# Altium PCB usb_ir.PCBDOC
Units mil, origin at the board's own origin, x right, y up, seen from the top; angles counter-clockwise.
Board outline 1399.8 x 1260 mil, 2 copper layers (Top Layer, Bottom Layer); 15 components, 17 nets, 58 pads, 0 vias.
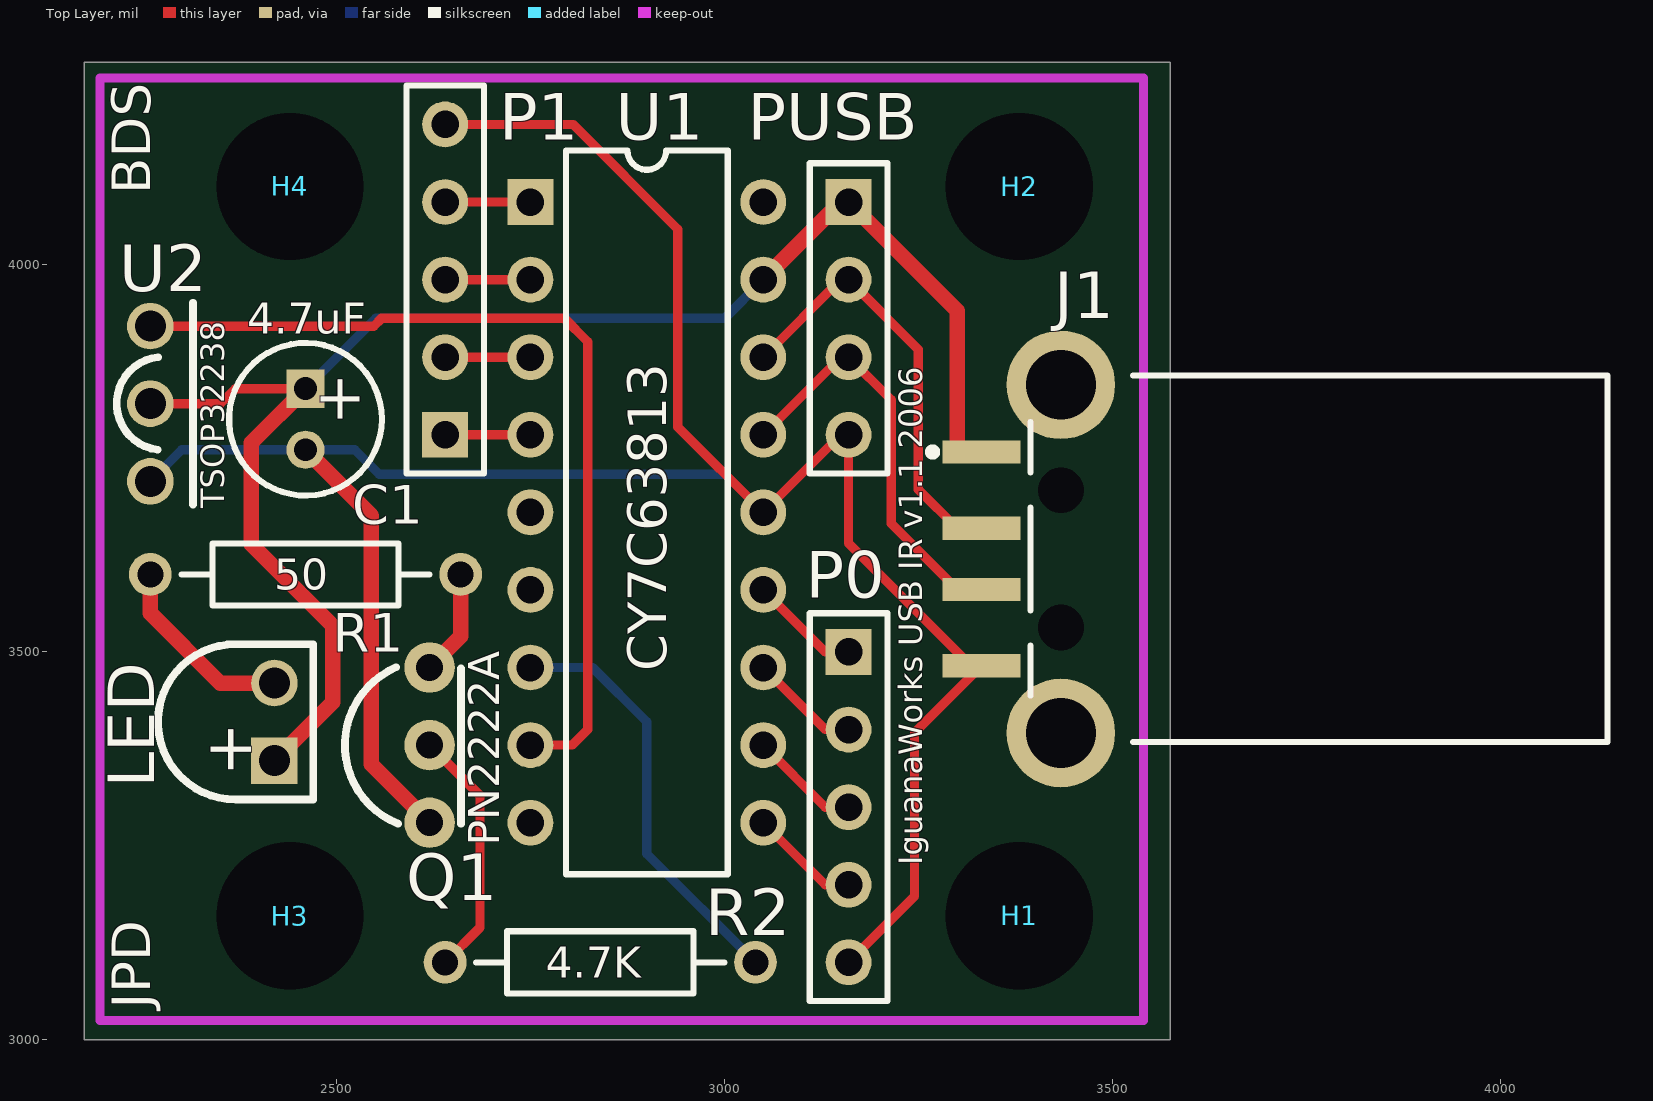
[diagram p0: Top Layer view]
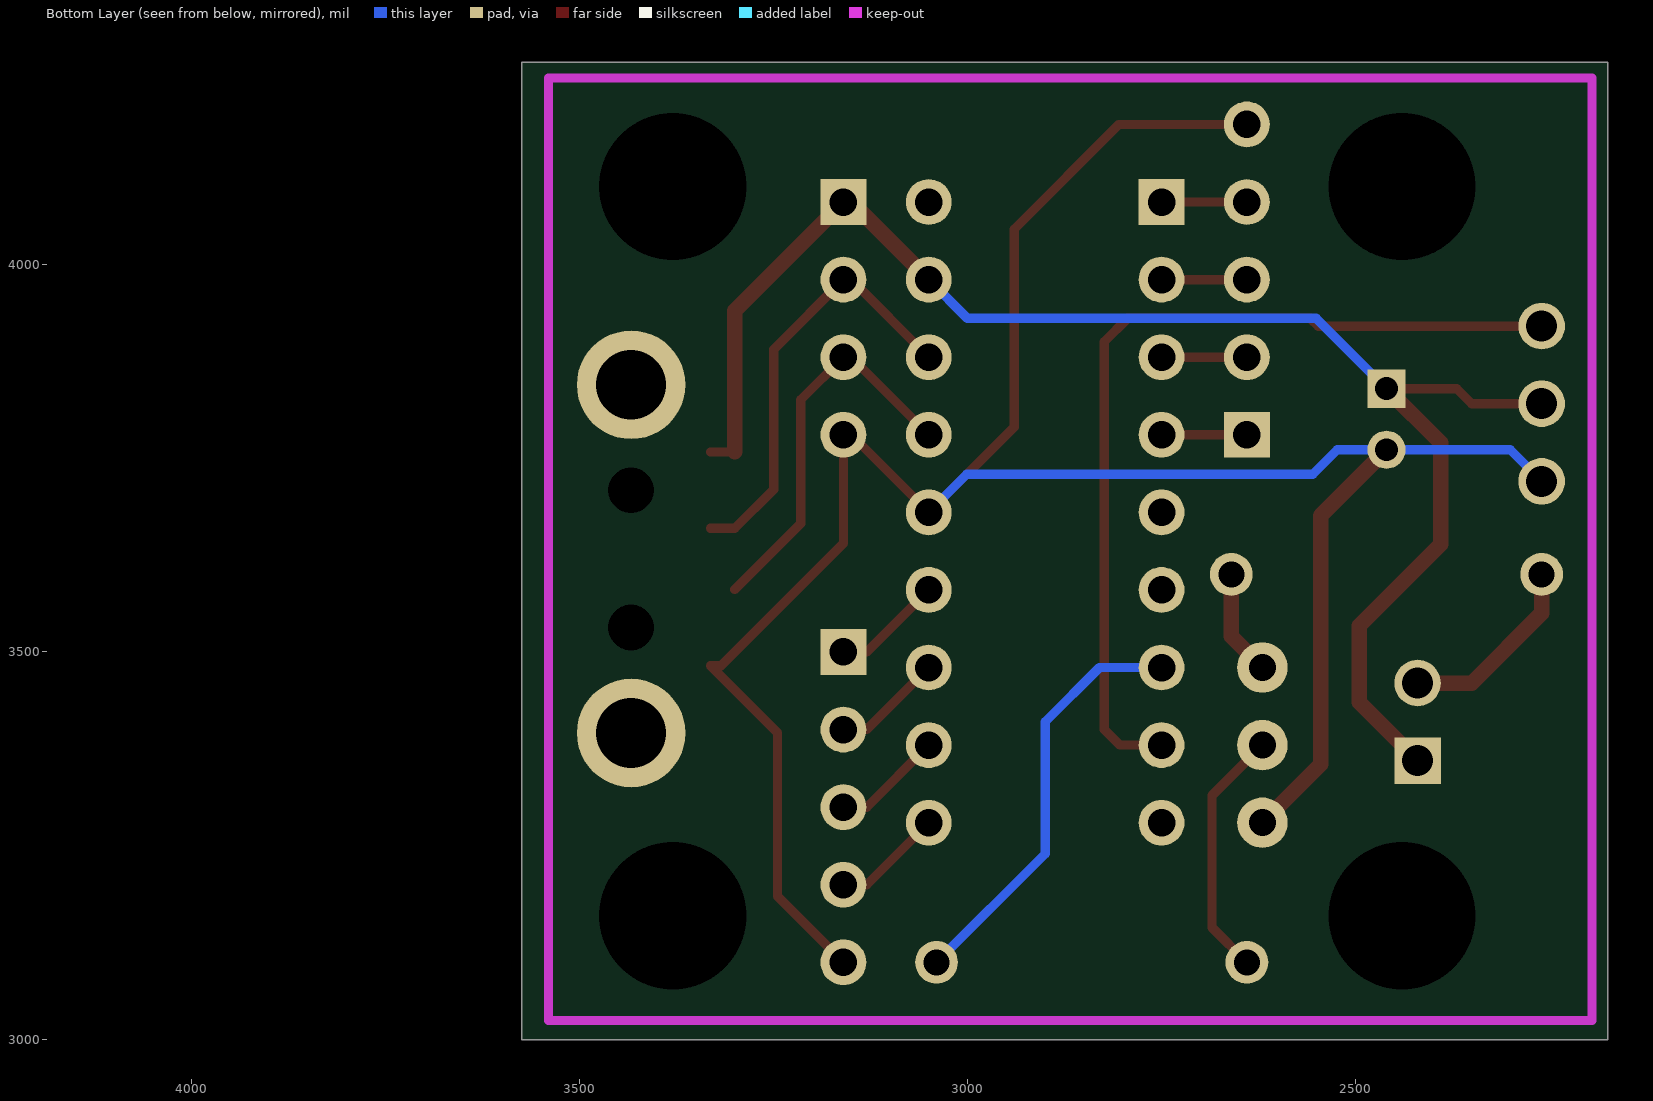
[diagram p1: Bottom Layer view, seen from below]

## Layer stack, top to bottom
Top Layer: signal copper 1.4
Dielectric: dielectric 12.6, FR-4, Dk 4.8
Bottom Layer: signal copper 1.4

## Board outline
2175,3000 3574.8,3000 3574.8,4259.84 2175,4260

## Design rules (kind name [scope] priority, off if disabled: settings)
Clearance [All] p1: gap=13
ComponentClearance [All] p1: gap=10 collisioncheckmode=2 verticalgap=10
HoleSize [All] p1: absolutevalues=TRUE maxlimit=200 minlimit=1 maxpercent=80.000 minpercent=20.000
PolygonConnect [All] p1: connectstyle=Relief reliefconductorwidth=10 reliefentries=4 polygonreliefangle="90 Angle"
RoutingVias [All] p1: holewidth=23.62 width=39.37 viastyle="Through Hole" minholewidth=28 minwidth=50 maxholewidth=28 maxwidth=50
SolderMaskExpansion [All] p1: expansion=1
TestPointUsage [All] p1: valid=0 allowmultiple=FALSE
Testpoint [All] p1: side=15 testpointundercomponent=TRUE minsize=40 maxsize=100 preferedsize=60 minholesize=0 maxholesize=40 preferedholesize=32 testpointgrid=1 style=1023 order=0-112345678
Width [All] p1: maxlimit=30 minlimit=12 preferedwidth=12
16 further rules are at their usual default settings.

## Components (designator, comment, footprint, x,y, rotation, side; value= is the part's Value field where it differs from the comment)
C1 "Cap Pol1" CAPPR2-5x6.8 2460,3800 r270 top
H1 "Lego Hole" "Lego Hole" 3380,3160 r0 top
H2 "Lego Hole" "Lego Hole" 3380,4100 r0 top
H3 "Lego Hole" "Lego Hole" 2440,3160 r0 top
H4 "Lego Hole" "Lego Hole" 2440,4100 r0 top
J1 "1-1470168-1" 1470695A 3540,3620 r0 top
LED "TSAL 6400 IRED" LED 2420,3360 r90 top
P0 "Port Header" HDR1X5 3160,3500 r270 top
P1 "SPI Header" HDR1X5 2640,3780 r90 top
PUSB "USB Header" HDR1X4 3160,4080 r270 top
Q1 "NPN" TO-92 2620,3280 r90 top
R1 "50ohm" AXIAL-0.4 2460,3600 r180 top
R2 "Res2" AXIAL-0.4 2840,3100 r180 top
U1 "CY7C63813-PXC" DIP-18 2900,3680 r270 top
U2 "TSOP32238" vishay1 2260,3920 r180 top

## Footprints (in the part's own frame and the unit in brackets; to place one, negate y for a bottom-side part, rotate by r counter-clockwise, add the part's x,y. Pads: shape width x height; smd on the part's side, far side on the other; paste and mask are expansions set on the pad)
1470695A [mm] "Connector; USB1.1, Type A, SM; 4 Position; Right Angle"
  rect 2.54x0.762 smd: 1(-5.3,3.5) 2(-5.3,1) 3(-5.3,-1) 4(-5.3,-3.5)
  round 3.556 hole 2.286: 5(-2.7,-5.7) 6(-2.7,5.7)
  round 1.2 hole 1.5 unplated: MH1(-2.7,-2.25) MH2(-2.7,2.25)
  silkscreen extent -7.02,-6 15.2,6
AXIAL-0.4 [mm] "Resistor; 2 Leads"
  round 1.4 hole 0.85: 1(-5.08,0) 2(5.08,0)
  silkscreen extent -4.06,-1.02 4.06,1.02
CAPPR2-5x6.8 [mm] "Capacitor, Electrolytic, Radial; Body 5 x 6.8 mm (Dia.xH typ); Pin Spacing 2 mm (typ)"
  rect 1.25x1.25 hole 0.75: 1(-1,0)
  round 1.25 hole 0.75: 2(1,0)
  silkscreen extent -2.5,-2.5 2.5,2.5
DIP-18 [mm] "DIP; 18 Leads; Row Spacing 7.62 mm; Pitch 2.54 mm"
  rect 1.5x1.5 hole 0.9: 1(-10.16,-3.81)
  round 1.5 hole 0.9: 2(-7.62,-3.81) 3(-5.08,-3.81) 4(-2.54,-3.81) 5(0,-3.81) 6(2.54,-3.81) 7(5.08,-3.81) 8(7.62,-3.81) 9(10.16,-3.81) 10(10.16,3.81) 11(7.62,3.81) 12(5.08,3.81) 13(2.54,3.81) 14(0,3.81) 15(-2.54,3.81) 16(-5.08,3.81) 17(-7.62,3.81) 18(-10.16,3.81)
  silkscreen extent -11.85,-2.65 11.85,2.65
HDR1X4 [mm] "Connector; Header; 4 Position"
  rect 1.5x1.5 hole 0.9: 1(0,0)
  round 1.5 hole 0.9: 2(2.54,0) 3(5.08,0) 4(7.62,0)
  silkscreen extent -1.27,-1.27 8.89,1.27
HDR1X5 [mm] "Connector; Header; 5 Position"
  rect 1.5x1.5 hole 0.9: 1(0,0)
  round 1.5 hole 0.9: 2(2.54,0) 3(5.08,0) 4(7.62,0) 5(10.16,0)
  silkscreen extent -1.27,-1.27 11.43,1.27
LED [mil] "2-pin LED footprint"
  rect 60x60 hole 40: 1(0,0)
  round 60 hole 40: 2(100,0)
  silkscreen extent -50,-50 150,150
"Lego Hole" [mil] "3/16\" Lego hole"
  round 50 hole 190 unplated: 0(0,0)
TO-92 [mil] "standard transistor package, spread leads"
  round 65 hole 35: 1(0,0) 2(100,0) 3(200,0)
  silkscreen extent -1,-41 200,109
vishay1 [mil] "small IR receiver"
  round 60 hole 40: 1(0,0) 2(0,100) 3(0,200)
  silkscreen extent -55,-30 43,230

## Part data
C1: "Polarized Capacitor (Radial)"
H1 H2 H3 H4: "Standard lego-size mounting hole"
J1: "USB 1.1, Right Angle, Thru-Hole, A Type, Receptacle, 4x4 Position, Stacked, Black"
LED: library part LED0, "Typical INFRARED GaAs LED"
P0 P1: library part "Header 5", "Header, 5-Pin"
PUSB: library part "Header 4", "Header, 4-Pin"
Q1: "NPN Bipolar Transistor"
R1: library part "Res Semi", "Semiconductor Resistor"
R2: "Resistor"
U1: "USB microcontroller"
U2: library part "TSOP2238 IR RECEIVER MODULE"

## Nets (pads, with @x,y where several pads share a name; then routed paths per layer and width w, separated by ;. In a path a pad name is that pad's centre, name@x,y a point inside that pad or via, vN(x,y) a via of type N, cw(c..) or ccw(c..) an arc to the next point about the centre after c; other vN are vias at no path point)
GND: C1.2 J1.4 P0.5 P1.5 PUSB.4 Q1.1 U1.14 U2.3 | length 3134.9
  Top Layer w12: P1.5 2805,4180 2940,4045 2940,3790 U1.14 PUSB.4@3150,3780 ; P0.5 3245,3185 3245,3395.87 J1.4 3317.8,3482.2 3160,3640 PUSB.4
  Top Layer w20: C1.2 2545,3675.63 2545,3355 Q1.1
  Bottom Layer w12: U2.3 2300.63,3760.63 2523.37,3760.63 2555,3729 3001,3729 U1.14 ; PUSB.4@3150,3780 PUSB.4
NetJ1_2: J1.2 PUSB.2 U1.16 | length 561.4
  Top Layer w12: U1.16 PUSB.2@3150,3980 ; PUSB.2 3250,3890 3250,3709.37 3300,3659.37 J1.2
  Bottom Layer w12: PUSB.2@3150,3980 PUSB.2
NetJ1_3: J1.3 PUSB.3 U1.15 | length 508.8
  Top Layer w12: U1.15 PUSB.3@3150,3880 ; PUSB.3 3215,3825 3215,3665.63 J1.3@3300,3580.63
  Bottom Layer w12: PUSB.3@3150,3880 PUSB.3
NetLED_2: LED.2 R1.2 | length 247.3
  Top Layer w20: R1.2 2260,3550 2350,3460 LED.2
NetP0_1: P0.1 U1.13 | length 153.1
  Top Layer w12: U1.13 3130,3500 P0.1 ; P0.1@3150,3480 P0.1@3160,3480
NetP0_2: P0.2 U1.12 | length 153.1
  Top Layer w12: U1.12 3130,3400 P0.2 ; P0.2@3150,3380 P0.2@3160,3380
NetP0_3: P0.3 U1.11 | length 153.1
  Top Layer w12: U1.11 3130,3300 P0.3 ; P0.3@3150,3280 P0.3@3160,3280
NetP0_4: P0.4 U1.10 | length 153.1
  Top Layer w12: U1.10 3130,3200 P0.4 ; P0.4@3150,3180 P0.4@3160,3180
NetP1_1: P1.1 U1.4 | length 110
  Top Layer w12: P1.1 U1.4
NetP1_2: P1.2 U1.3 | length 110
  Top Layer w12: P1.2 U1.3
NetP1_3: P1.3 U1.2 | length 110
  Top Layer w12: P1.3 U1.2
NetP1_4: P1.4 U1.1 | length 110
  Top Layer w12: P1.4 U1.1
NetQ1_1: Q1.3 R1.1 | length 136.6
  Top Layer w20: Q1.3 2660,3520 R1.1
NetQ1_2: Q1.2 R2.2 | length 325.6
  Top Layer w12: Q1.2 2685,3315 2685,3145 R2.2
NetR2_1: R2.1 U1.7 | length 547
  Bottom Layer w12: U1.7 2830,3480 2900,3410 2900,3240 R2.1
NetU1_8: U1.8 U2.1 | length 1162.9
  Top Layer w12: U2.1 2548,3920 2558,3930 2794,3930 2824,3900 2824,3400 2804,3380 U1.8
VCC: C1.1 J1.1 LED.1 PUSB.1 U1.17 U2.2 | length 2002.2
  Top Layer w12: U2.2 2350,3820 2369.37,3839.37 C1.1 ; J1.1@3300,3757.8 J1.1
  Top Layer w20: LED.1 2495,3435 2495,3534 2390,3639 2390,3769.37 C1.1 ; U1.17 PUSB.1@3150,4080 ; PUSB.1 3300,3940 J1.1@3300,3757.8
  Bottom Layer w12: C1.1 2550.63,3930 3000,3930 U1.17 ; PUSB.1@3150,4080 PUSB.1
pads on no net: H1.0 H2.0 H3.0 H4.0 J1.5 J1.6 J1.MH1 J1.MH2 U1.5 U1.6 U1.9 U1.18

## Keep-outs
Keep-Out Layer:
  lines w11.81: 2195,3025 3540,3025 3540,4240 2195,4240 2195,3025

## Silkscreen, mask and mechanical layers (free items; w line width, h text height)
Top Overlay:
  text "BDS" at 2260,4090 h50 r90
  text "4.7uF" at 2385,3910 h40
  text "TSOP32238" at 2355,3685 h30 r90
  text "50" at 2420,3580 h40
  text "CY7C63813" at 2925,3475 h50 r90
  text "+" at 2390,3340 h60 r90
  text "PN2222A" at 2710,3250 h40 r90
  text "IguanaWorks USB IR v1.1 2006" at 3255,3225 h30 r90
  text "4.7K" at 2770,3080 h40
  text "JPD" at 2260,3040 h50 r90

## Text inside footprints (layer, text, board x,y; h text height)
C1: Top Overlay "+" at 2480,3860 h59.06 r270
J1: Mechanical 1 "PCB Edge" at 3558.61,3416.35 h9.84 r90